# Altium PCB Payload Development Kit.PcbDoc
Units mm, origin at the board's own origin, x right, y up, seen from the top; angles counter-clockwise.
Board outline 135 x 155 mm, 6 copper layers (Top Layer, Mid-Layer 1, Mid-Layer 2, Mid-Layer 3, Mid-Layer 4, Bottom Layer), stack 3.094 mm thick; 30 components, 37 nets, 204 pads, 53 vias.
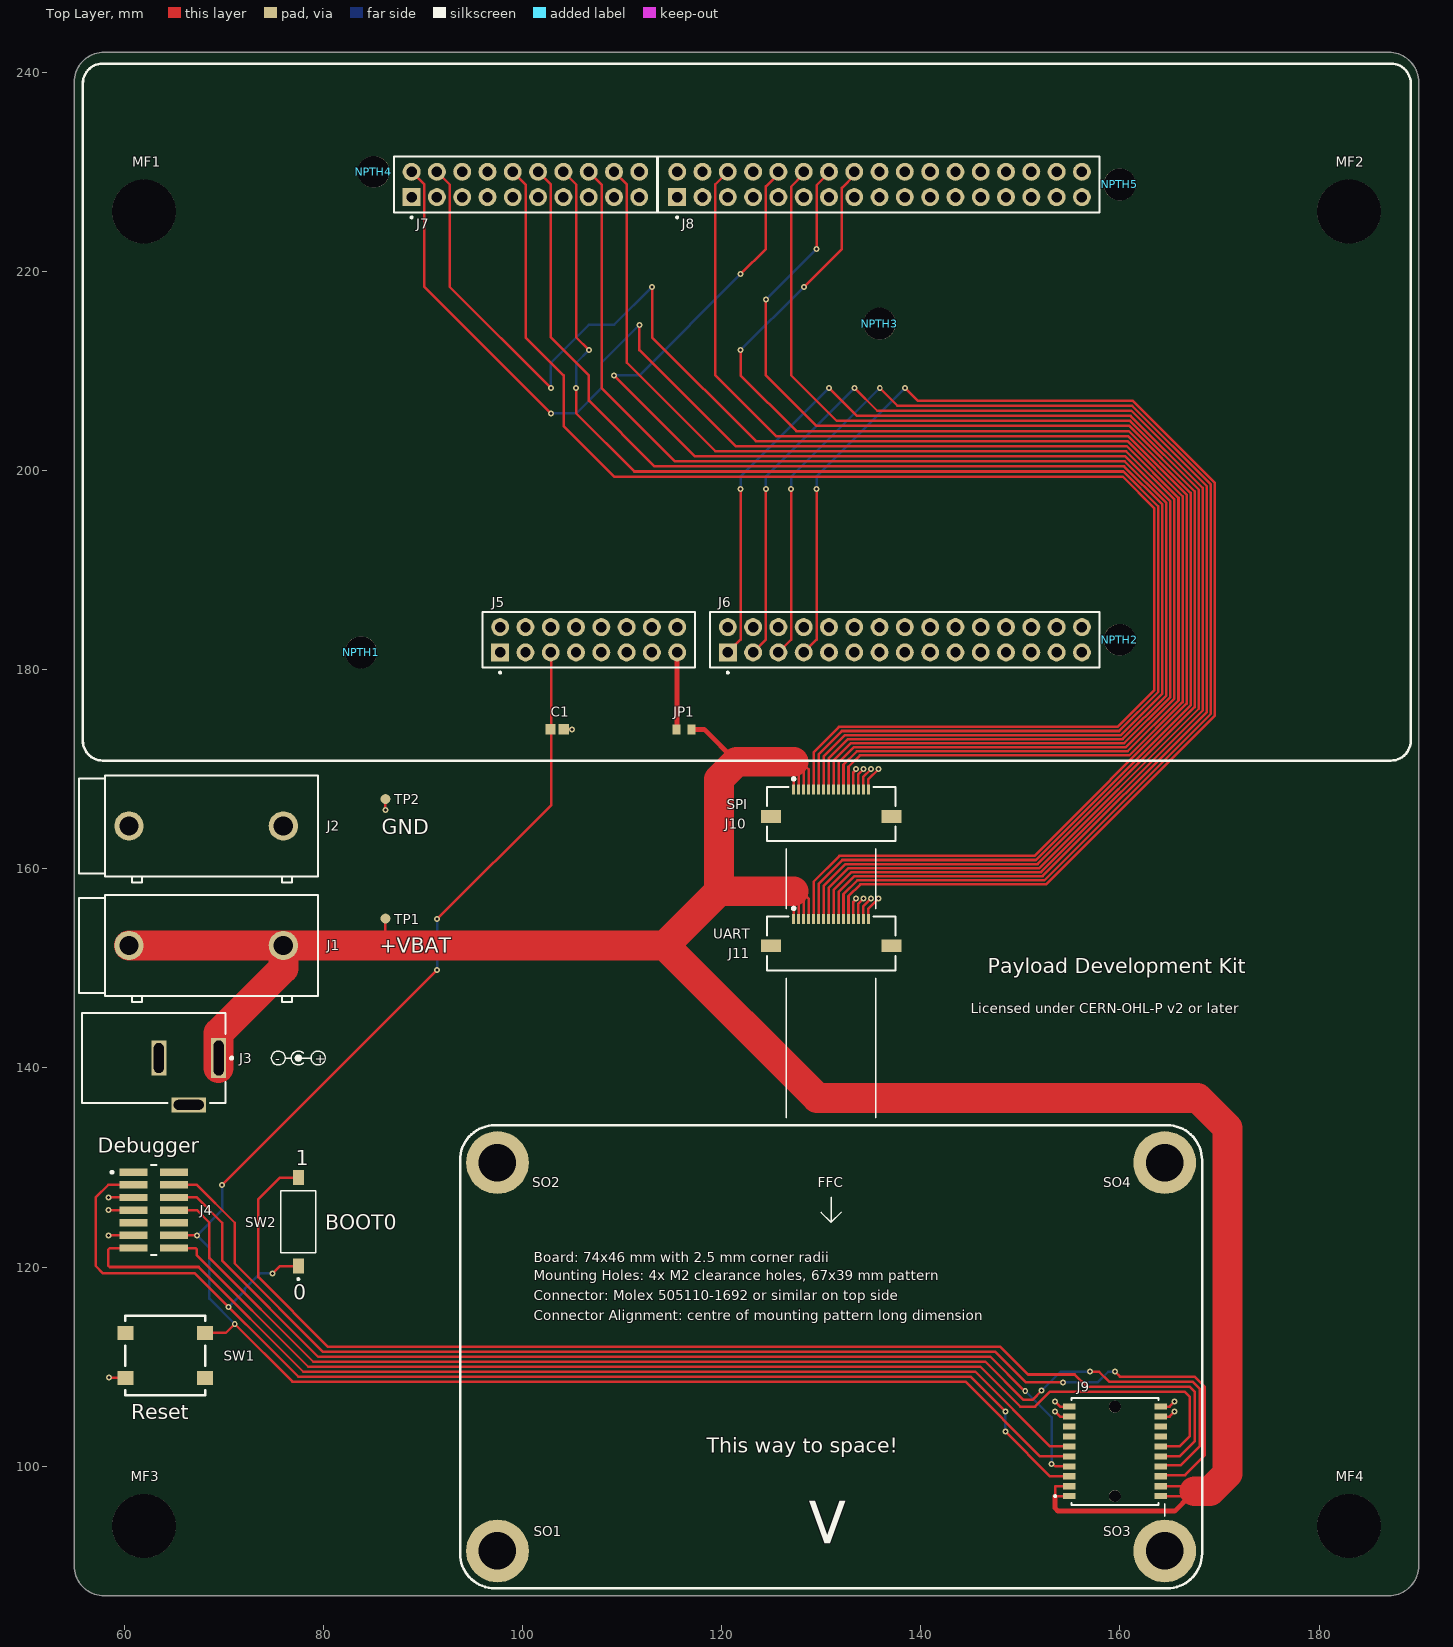
[diagram p0: Top Layer view]
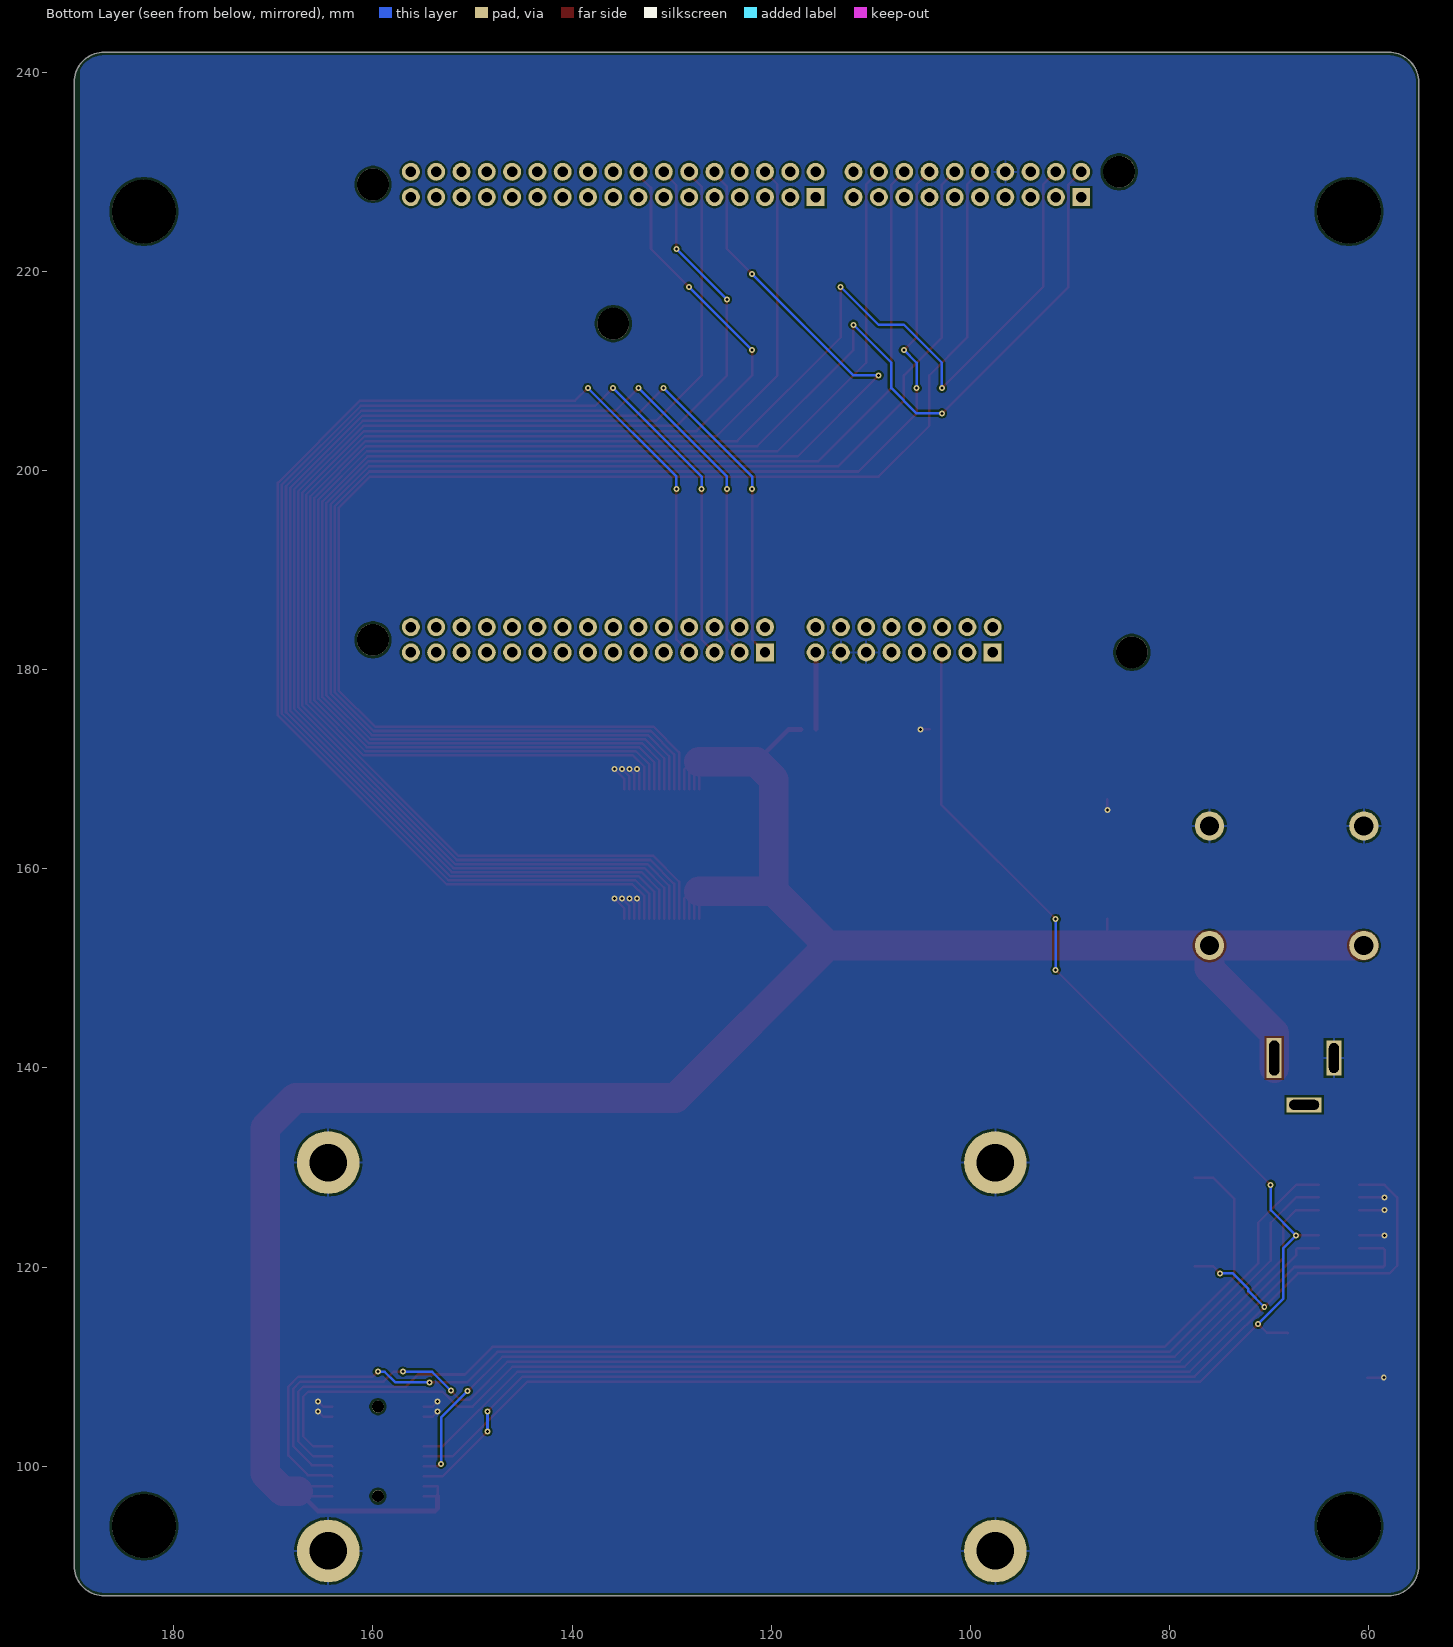
[diagram p1: Bottom Layer view, seen from below]
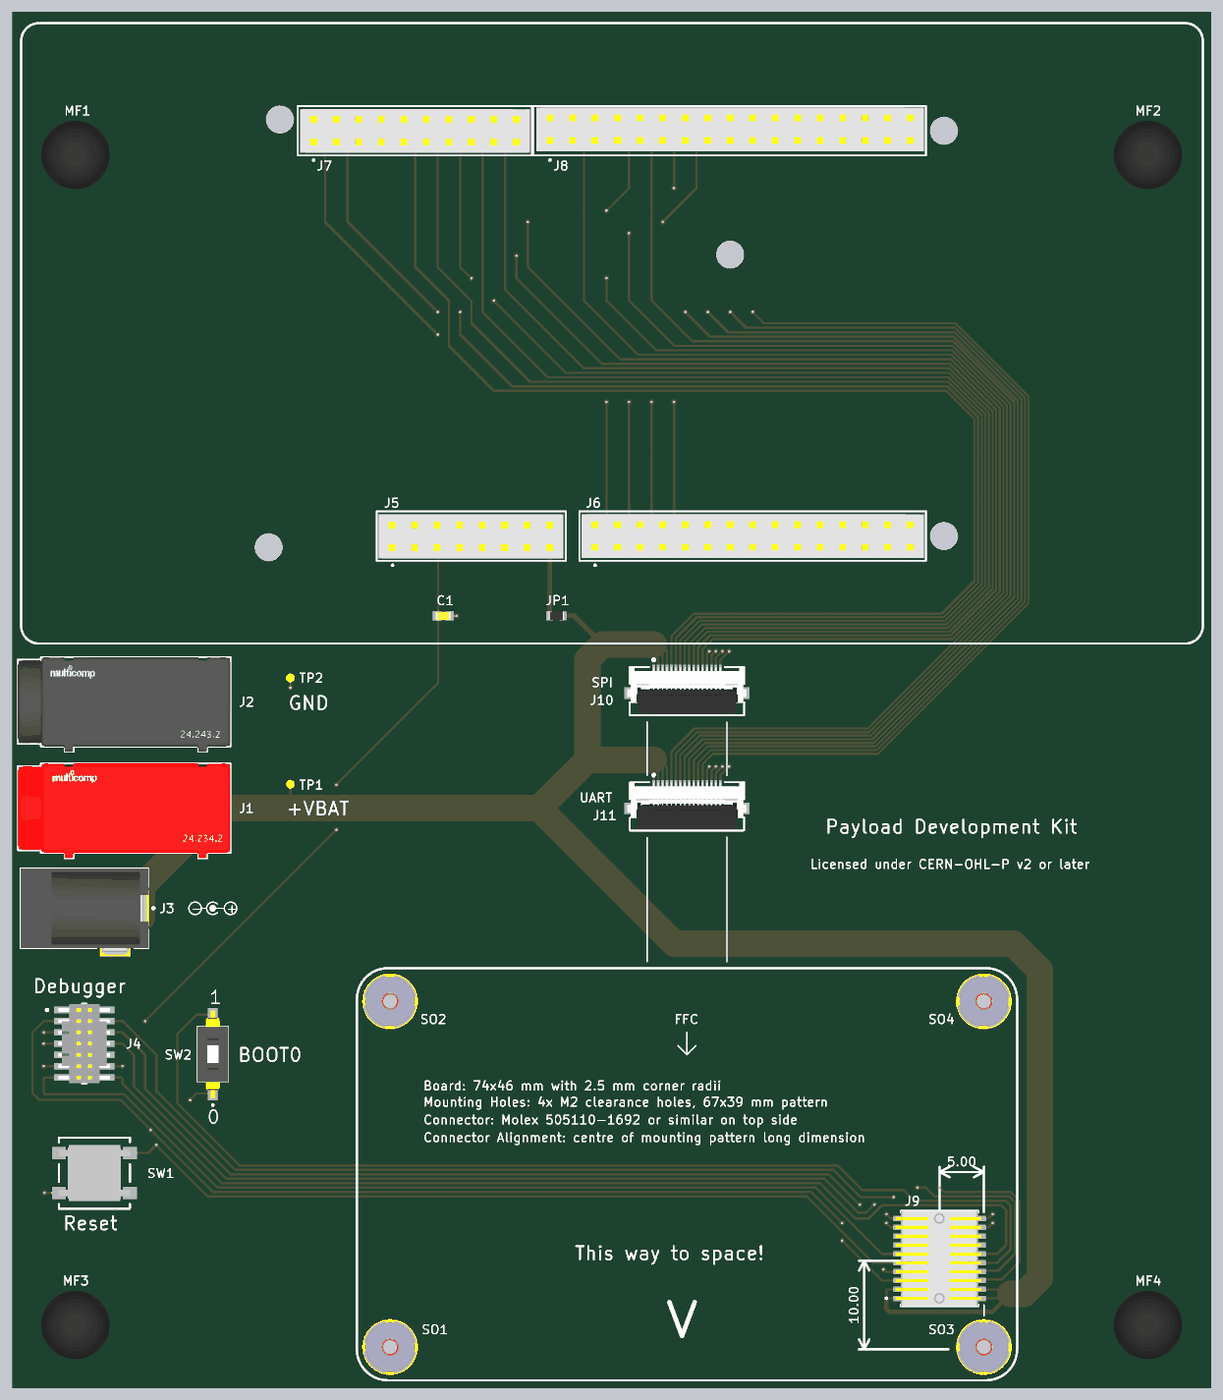
[diagram p2: 3D render of the assembled board from above, using the file's embedded part models]

## Layer stack, top to bottom
Top Solder: solder mask 0.0102, Solder Resist, Dk 3.5
Top Layer: signal copper 0.0356
Dielectric 1: dielectric 1.6, FR-4, Dk 4.8
Mid-Layer 1: signal copper 0.0356
Dielectric5: dielectric 0.32, FR-4, Dk 4.8
Mid-Layer 2: signal copper 0.0356
Dielectric3: dielectric 0.32, FR-4, Dk 4.8
Mid-Layer 3: signal copper 0.0356
Dielectric2: dielectric 0.32, FR-4, Dk 4.8
Mid-Layer 4: signal copper 0.0356
Dielectric4: dielectric 0.32, FR-4, Dk 4.8
Bottom Layer: signal copper 0.0356
Bottom Solder: solder mask 0.0102, Solder Resist, Dk 3.5

## Board outline
55,90 55,239 cw(c58,239) 58,242 187,242 cw(c187,239) 190,239 190,90 cw(c187,90) 187,87 58,87 cw(c58,90)

## Design rules (kind name [scope] priority, off if disabled: settings)
BoardOutlineClearance BoardOutlineClearanceLegend [OnLayer('Top Overlay')] p1: gap=0 ignorepadtopadclearanceinfootprint=FALSE
BoardOutlineClearance [All] p2: gap=0.3 ignorepadtopadclearanceinfootprint=FALSE
Clearance [All] p1: gap=0.2 ignorepadtopadclearanceinfootprint=TRUE except(0: Arc-Text Track-Text Via-Text Fill-Text Poly-Text Region-Text Text-Text; 0.15: SMDPad-Text THPad-Text; 0.152: Arc-Arc Arc-Track Arc-SMDPad Track-Track Track-SMDPad SMDPad-SMDPad; 0.254: Arc-Hole Track-Hole SMDPad-Hole THPad-Hole Via-Hole Fill-Hole Poly-Hole Region-Hole Text-Hole)
ComponentClearance [Not IsComponent] p1: gap=0.254 collisioncheckmode=3 verticalgap=0.254 showdistances=FALSE
HoleSize [All] p1: absolutevalues=TRUE maxlimit=6.4 minlimit=0.15 maxpercent=80.000 minpercent=20.000
MinimumAnnularRing [All] p1: minimumring=0.15
MinimumSolderMaskSliver [All] p1: minsoldermaskwidth=0.176
PolygonConnect [All] p1: thpad.connectstyle=Relief thpad.reliefconductorwidth=0.254 thpad.reliefentries=4 thpad.polygonreliefangle="90 Angle" thpad.airgapwidth=0.254 smdpad.connectstyle=Relief smdpad.reliefconductorwidth=0.254 smdpad.reliefentries=4 smdpad.polygonreliefangle="90 Angle" smdpad.airgapwidth=0.254 via.connectstyle=Direct via.reliefconductorwidth=0.254 via.reliefentries=4 via.polygonreliefangle="90 Angle" via.airgapwidth=0.254
RoutingVias [All] p1: holewidth=0.3 width=0.5 viastyle="Through Hole" minholewidth=0.3 minwidth=0.5 maxholewidth=2.8 maxwidth=3
SilkToSilkClearance [All] p1: silktosilkclearance=0.1
SolderMaskExpansion TentVias [IsVia] p1: expansion=0.102 istentingtop=TRUE
SolderMaskExpansion [All] p2: expansion=0.038 istentingtop=FALSE
Width [All] p1: maxlimit=3 minlimit=0.152 preferedwidth=0.254 midlayer1_minwidth=0.254 midlayer1_maxwidth=0.254 midlayer2_minwidth=0.254 midlayer2_maxwidth=0.254 midlayer3_minwidth=0.254 midlayer3_maxwidth=0.254 midlayer4_minwidth=0.254 midlayer4_maxwidth=0.254 minimp=50.000000 maximp=50.000000 favimp=50.000000
26 further rules are at their usual default settings.

## Components (designator, comment, footprint, x,y, rotation, side; value= is the part's Value field where it differs from the comment)
C1 "Capacitor 100 nF +/-10% 50 V 0603" CAPC1608X90X40ML10T20 103.5,174 r0 top locked value=100nF
J1 "24.243.1" FP-24_243_1-MFG 67.5,152 r0 top locked
J2 "24.243.2" FP-24_243_2-MFG 67.5,164 r0 top locked
J3 "PJ-002A" CUI-PJ-002A_V 66.5,141 r180 top locked
J4 "STDC14" FP-FTSH-107-01-L-DV-K 62.995,125.73 r270 top locked
J5 "Header 2x8" SAMTEC_SSW-108-01-T-D 106.66,183 r180 top locked
J6 "Header 2x15" SAMTEC_SSW-115-01-T-D 138.41,183 r180 top locked
J7 "Header 2x10" SAMTEC_SSW-110-01-T-D 100.31,228.72 r180 top locked
J8 "Header 2x17" SAMTEC_SSW-117-01-T-D 135.87,228.72 r180 top locked
J9 "FSI-110-03-G-D-AD" SAMTEC_FSI-110-03-X-D-AD-TR 159.5,101.5 r90 top locked
J10 "505110-1692" FP-505110-1692-MFG 131,165.5 r0 top
J11 "505110-1692" FP-505110-1692-MFG 131,152.5 r0 top locked
JP1 "CMP-009-00177-3" RESC1608X55X25ML10T15 116.25,174 r180 top value=0
MF1 "G2025" "New footprint 1" 62,226 r0 top locked
MF2 "G2025" "New footprint 1" 183,226 r0 top locked
MF3 "G2025" "New footprint 1" 62,94 r0 top locked
MF4 "G2025" "New footprint 1" 183,94 r0 top locked
NPTH1 "NPTH-M3" NPTH-M3 83.8,181.73 r180 top locked
NPTH2 "NPTH-M3" NPTH-M3 160,183 r180 top locked
NPTH3 "NPTH-M3" NPTH-M3 135.87,214.75 r180 top locked
NPTH4 "NPTH-M3" NPTH-M3 85.07,229.99 r180 top locked
NPTH5 "NPTH-M3" NPTH-M3 160,228.72 r180 top locked
SO1 "SMTSOB-M2-3ET" SMTSOB-M2-3ET 97.5,91.5 r0 top
SO2 "SMTSOB-M2-3ET" SMTSOB-M2-3ET 97.5,130.5 r0 top
SO3 "SMTSOB-M2-3ET" SMTSOB-M2-3ET 164.5,91.5 r0 top
SO4 "SMTSOB-M2-3ET" SMTSOB-M2-3ET 164.5,130.5 r0 top
SW1 "B3FS-1010P" B3FS-1010P-Footprint-1 64.135,111.125 r0 top locked
SW2 "DS04-254-2-01BK-SMT" SW_DS04-254-1-01BK-SMT 77.5,124.55 r90 top locked
TP1 "TP-1MM" TESTPOINT_1MMR-Footprint-1#1 86.25,155 r90 top
TP2 "TP-1MM" TESTPOINT_1MMR-Footprint-1#2 86.25,166.95 r90 top

## Footprints (in the part's own frame and the unit in brackets; to place one, negate y for a bottom-side part, rotate by r counter-clockwise, add the part's x,y. Pads: shape width x height; smd on the part's side, far side on the other; paste and mask are expansions set on the pad)
B3FS-1010P-Footprint-1 [mm]
  rect 1.6x1.4 smd: 1(4,-2.25) 2(-4,-2.25) 3(4,2.25) 4(-4,2.25)
  silkscreen extent -4,-4 4,4, body extent -4,-3.15 4,3.15, height 4.3
CAPC1608X90X40ML10T20 [mm] "Chip Capacitor, 2-Leads, Body 1.70x0.90mm, IPC Low Density"
  rect 1.05x1.05 smd: 1(-0.675,0) 2(0.675,0)
  body extent -0.85,-0.45 0.85,0.45, height 0.9
CUI-PJ-002A_V [mm] "THD, 3-Leads, Body 14.4x9mm, Height 11mm"
  rect 1.5x4 hole 1 slot 3.5 at 90 deg: 1(-3,0)
  rect 1.5x3.5 hole 1 slot 3 at 90 deg: 2(3,0)
  rect 3.5x1.5 hole 1 slot 3 at 0 deg: 3(0,4.7)
  silkscreen extent -4.43,-4.5 10.7,4.5, body extent -3.7,-4.5 10.7,4.9, height 11
FP-24_243_1-MFG [mm]
  round 2.95 hole 1.95 paste-1000 mask+0: 1(-7,0.3) 2(8.5,0.3)
  silkscreen extent -12,-5.35 12,5.35, body extent -12,-5.35 12,5.35, height 13.08
FP-24_243_2-MFG [mm]
  round 2.95 hole 1.95 paste-1000 mask+0: 1(-7,0.3) 2(8.5,0.3)
  silkscreen extent -12,-5.35 12,5.35, body extent -12.1,-5.45 12.1,5.45, height 0.25
FP-505110-1692-MFG [mm]
  rect 0.3x1 smd paste+0 mask+0: 1(-3.75,2.475) 2(-3.25,2.475) 3(-2.75,2.475) 4(-2.25,2.475) 5(-1.75,2.475) 6(-1.25,2.475) 7(-0.75,2.475) 8(-0.25,2.475) 9(0.25,2.475) 10(0.75,2.475) 11(1.25,2.475) 12(1.75,2.475) 13(2.25,2.475) 14(2.75,2.475) 15(3.25,2.475) 16(3.75,2.475)
  rect 2x1.3 smd paste+0 mask+0: 17(-6.05,-0.225) 18(6.05,-0.225)
  silkscreen extent -6.45,-2.73 6.45,3.65, body extent -7.15,-2.83 7.15,3.08, height 0.25
FP-FTSH-107-01-L-DV-K [mm]
  rect 0.74x2.79 smd paste+0 mask+0: 1(-3.81,-2.035) 2(-3.81,2.035) 3(-2.54,-2.035) 4(-2.54,2.035) 5(-1.27,-2.035) 6(-1.27,2.035) 7(0,-2.035) 8(0,2.035) 9(1.27,-2.035) 10(1.27,2.035) 11(2.54,-2.035) 12(2.54,2.035) 13(3.81,-2.035) 14(3.81,2.035)
  silkscreen extent -4.51,-4.32 4.51,0.27, body extent -4.61,-3.53 4.61,3.53, height 0.25
"New footprint 1" [mm]
  round 6.4 hole 6.4 unplated: Hole(0,0)
  body extent -6.35,-6.35 6.34,6.35, height 3.31
NPTH-M3 [mm]
  round 3.2 hole 3.2 unplated: 1(0,0)
RESC1608X55X25ML10T15 [mm] "Chip Resistor, 2-Leads, Body 1.70x0.90mm, IPC Low Density"
  rect 0.8x1 smd: 1(-0.75,0) 2(0.75,0)
  body extent -0.85,-0.45 0.85,0.45, height 0.55
SAMTEC_FSI-110-03-X-D-AD-TR [mm]
  rect 0.61x1.26 smd: 1(-4.5,4.59) 2(-4.5,-4.59) 3(-3.5,4.59) 4(-3.5,-4.59) 5(-2.5,4.59) 6(-2.5,-4.59) 7(-1.5,4.59) 8(-1.5,-4.59) 9(-0.5,4.59) 10(-0.5,-4.59) 11(0.5,4.59) 12(0.5,-4.59) 13(1.5,4.59) 14(1.5,-4.59) 15(2.5,4.59) 16(2.5,-4.59) 17(3.5,4.59) 18(3.5,-4.59) 19(4.5,4.59) 20(4.5,-4.59)
  round 1.19 hole 1.19 unplated: ""(-4.5,0) ""(4.5,0)
  silkscreen extent -5.38,-4.38 5.38,6.1, body extent -5.38,-4.98 5.38,5.02, height 4.25
SAMTEC_SSW-108-01-T-D [mm]
  rect 1.8x1.8 hole 1.04: 1(8.89,1.27)
  round 1.8 hole 1.04: 2(8.89,-1.27) 3(6.35,1.27) 4(6.35,-1.27) 5(3.81,1.27) 6(3.81,-1.27) 7(1.27,1.27) 8(1.27,-1.27) 9(-1.27,1.27) 10(-1.27,-1.27) 11(-3.81,1.27) 12(-3.81,-1.27) 13(-6.35,1.27) 14(-6.35,-1.27) 15(-8.89,1.27) 16(-8.89,-1.27)
  silkscreen extent -10.67,-2.79 10.67,3.4, body extent -10.37,-2.43 10.45,2.53, height 8.51
SAMTEC_SSW-110-01-T-D [mm]
  rect 1.8x1.8 hole 1.04: 1(11.43,1.27)
  round 1.8 hole 1.04: 2(11.43,-1.27) 3(8.89,1.27) 4(8.89,-1.27) 5(6.35,1.27) 6(6.35,-1.27) 7(3.81,1.27) 8(3.81,-1.27) 9(1.27,1.27) 10(1.27,-1.27) 11(-1.27,1.27) 12(-1.27,-1.27) 13(-3.81,1.27) 14(-3.81,-1.27) 15(-6.35,1.27) 16(-6.35,-1.27) 17(-8.89,1.27) 18(-8.89,-1.27) 19(-11.43,1.27) 20(-11.43,-1.27)
  silkscreen extent -13.21,-2.79 13.21,3.4, body extent -12.95,-2.48 12.95,2.48, height 8.51
SAMTEC_SSW-115-01-T-D [mm]
  rect 1.8x1.8 hole 1.04: 1(17.78,1.27)
  round 1.8 hole 1.04: 2(17.78,-1.27) 3(15.24,1.27) 4(15.24,-1.27) 5(12.7,1.27) 6(12.7,-1.27) 7(10.16,1.27) 8(10.16,-1.27) 9(7.62,1.27) 10(7.62,-1.27) 11(5.08,1.27) 12(5.08,-1.27) 13(2.54,1.27) 14(2.54,-1.27) 15(0,1.27) 16(0,-1.27) 17(-2.54,1.27) 18(-2.54,-1.27) 19(-5.08,1.27) 20(-5.08,-1.27) 21(-7.62,1.27) 22(-7.62,-1.27) 23(-10.16,1.27) 24(-10.16,-1.27) 25(-12.7,1.27) 26(-12.7,-1.27) 27(-15.24,1.27) 28(-15.24,-1.27) 29(-17.78,1.27) 30(-17.78,-1.27)
  silkscreen extent -19.56,-2.79 19.56,3.4, body extent -19.3,-2.48 19.3,2.48, height 8.51
SAMTEC_SSW-117-01-T-D [mm]
  rect 1.8x1.8 hole 1.04: 1(20.32,1.27)
  round 1.8 hole 1.04: 2(20.32,-1.27) 3(17.78,1.27) 4(17.78,-1.27) 5(15.24,1.27) 6(15.24,-1.27) 7(12.7,1.27) 8(12.7,-1.27) 9(10.16,1.27) 10(10.16,-1.27) 11(7.62,1.27) 12(7.62,-1.27) 13(5.08,1.27) 14(5.08,-1.27) 15(2.54,1.27) 16(2.54,-1.27) 17(0,1.27) 18(0,-1.27) 19(-2.54,1.27) 20(-2.54,-1.27) 21(-5.08,1.27) 22(-5.08,-1.27) 23(-7.62,1.27) 24(-7.62,-1.27) 25(-10.16,1.27) 26(-10.16,-1.27) 27(-12.7,1.27) 28(-12.7,-1.27) 29(-15.24,1.27) 30(-15.24,-1.27) 31(-17.78,1.27) 32(-17.78,-1.27) 33(-20.32,1.27) 34(-20.32,-1.27)
  silkscreen extent -22.1,-2.79 22.24,3.4, body extent -21.84,-2.64 21.84,2.31, height 8.51
SMTSOB-M2-3ET [mm] "M2x3mm SMD Standoff, Brass"
  round 6.3 hole 3.77: 1(0,0)
  body extent -2.78,-2.77 2.78,2.77, height 3
SW_DS04-254-1-01BK-SMT [mm]
  rect 1.5x1.1 smd: 1(-4.45,0) 2(4.45,0)
  silkscreen extent -5.85,-1.77 3.1,1.77, body extent -4.95,-1.77 4.95,1.77, height 4.42
TESTPOINT_1MMR-Footprint-1#1 [mm]
  round 1 smd paste-1: 1(0,0)
TESTPOINT_1MMR-Footprint-1#2 [mm]
  round 1 smd paste-1: 1(0.05,0)

## Part data
C1: library part CMP-001-00130-3, "Chip Capacitor, 100 nF, +/- 10%, 50 V, 0603 (1608 Metric)", Capacitor Type=Ceramic, Case/Package=0603, Max Operating Temperature=125°C, Min Operating Temperature=-55°C, Tolerance=10%, Voltage Rating=50V, Component Type=Standard, Design Item ID=CMP-001-00017-10, Mounting Technology="Surface Mount", Pins=2, RoHS Compliant=Yes, Source="Components - 14.07.23 - 14.28.SchLib"
J1: library part CMP-002-00135-3, "Banana Test Connector, 4mm, Socket, PCB Mount, 24 A, 60 VDC, Silver Plated Contacts, Red", Component Type=Connectors, Design Item ID=CMP-002-00024-4, Pins=2, RoHS Compliant=Yes, Source="Spacecraft Emulator Nucleo-144 Shield.SCHLIB"
J2: library part CMP-002-00134-3, "Banana Test Connector, 4mm, Socket, PCB Mount, 24 A, 60 VDC, Silver Plated Contacts, Black", Component Type=Connectors, Design Item ID=CMP-002-00023-3, Pins=2, RoHS Compliant=Yes, Source="Spacecraft Emulator Nucleo-144 Shield.SCHLIB"
J3: library part CMP-002-00139-1, "2.1mm Dia Centre Pin, 5.5mm barrel, 24V, 2.5A", Max Current Rating=2.5A, Voltage Rating=24V, Connector Type=Circular,Power, Mounting Technology=Board, RoHS Compliant=Yes
J4: library part CMP-049-000000-6, "STDC14 for STLINK Programmer", ComponentLink1Description="Manufacturer Link", ComponentLink1URL=https://www.st.com/en/development-tools/stlink-v3mini.html#overview, Design Item ID=CMP-002-00076-5, Mounting Technology=Board, RoHS Compliant=Yes, Source=STDC14.SchLib
J5: library part CMP-002-00130-14, Max Operating Temperature=125°C, Min Operating Temperature=-65°C, Component Type=Connectors, Connector Type="BOARD CONNECTOR", Design Item ID=CMP-002-00019-12, Mounting Technology=Board, Pins=16, RoHS Compliant=Yes, Source="Spacecraft Emulator Nucleo-144 Shield.SCHLIB"
J6: library part CMP-002-00131-10, Max Operating Temperature=125°C, Min Operating Temperature=-65°C, Component Type=Connectors, Design Item ID=CMP-002-00020-6, Mounting Technology=Board, Pins=30, RoHS Compliant=Yes, Source="Spacecraft Emulator Nucleo-144 Shield.SCHLIB"
J7: library part CMP-002-00132-12, Max Operating Temperature=125°C, Min Operating Temperature=-65°C, Component Type=Connectors, Connector Type="BOARD CONNECTOR", Design Item ID=CMP-002-00021-9, Mounting Technology=Board, Pins=20, RoHS Compliant=Yes, Source="Spacecraft Emulator Nucleo-144 Shield.SCHLIB"
J8: library part CMP-002-00133-10, Max Operating Temperature=125°C, Min Operating Temperature=-65°C, Component Type=Connectors, Design Item ID=CMP-002-00022-6, Mounting Technology=Board, Pins=34, RoHS Compliant=Yes, Source="Spacecraft Emulator Nucleo-144 Shield.SCHLIB"
J9: library part CMP-002-00138-2, "20 Position, 2 Row, 1mm Pich One Piece Connector, SMD, Samtec FSI-110-03-G-D-AD", ComponentLink1Description="Manufacturer Page", ComponentLink1URL=https://www.samtec.com/products/fsi-110-03-g-d-ad, Design Item ID=CMP-002-00071-3, Source=FSI-110-03-G-D-AD.SchLib
J10 J11: library part CMP-002-00136-2, "Conn FFC/FPC Connector SKT 16 POS 0.5mm Solder RA SMD Easy-On™ T/R", Component Type=Connectors, Design Item ID=CMP-002-00072-15, Pins=18, Source="Spacecraft Emulator Nucleo-144 Shield.SCHLIB"
JP1: library part CMP-082-000000-1, "Jumper 0603", Case/Package=0603, Max Operating Temperature=155°C, Min Operating Temperature=-55°C, Component Type=Standard, Design Item ID=CMP-009-00177-3, Pin Count=2, Pins=2, Source="Components - 20.07.23 - 16.55.SchLib"
MF1 MF2 MF3 MF4: library part CMP-00028-00024-4, "Rubber Push-In Bumper Ø12.7 mm by 12.7 mm high"
NPTH1 NPTH2 NPTH3 NPTH4 NPTH5: library part CMP-00000-2, "M3 Non-Plated Through Hole", Component Type=Mechanical, Design Item ID=CMP-00028-00015-4, Pin Count=1, Pins=1, Source="Spacecraft Emulator Nucleo-144 Shield.SCHLIB"
SO1 SO2 SO3 SO4: library part CMP-00028-00023-1, "M2x3mm SMD Standoff, Brass", Design Item ID=CMP-00028-00008-1, Pins=1, Source="Components - 17.07.23 - 17.23.SchLib"
SW1: library part CMP-011-00019-2, "Keypad Switch, 1 Switches, SPST, Momentary-tactile, 0.05A, 24VDC, 1.27N, Solder Terminal, Surface Mount-straight", Max Current Rating=50mA, Max Operating Temperature=70°C, Min Operating Temperature=-25°C, Voltage Rating=24V, Mounting Technology="Surface Mount", RoHS Compliant=Yes
SW2: library part CMP-011-00020-4, "DIP Switch"
TP1 TP2: library part CMP-00001-2, "1mm Round Test Point", Component Type=Miscellaneous, Design Item ID=CMP-001-0000-4, Pin Count=1, Source="Spacecraft Emulator Nucleo-144 Shield.SCHLIB"

## Via types
v1: diameter 0.6, hole 0.3, Top Layer to Bottom Layer, tented both sides, 53 vias

## Nets (pads, with @x,y where several pads share a name; then routed paths per layer and width w, separated by ;. In a path a pad name is that pad's centre, name@x,y a point inside that pad or via, vN(x,y) a via of type N, cw(c..) or ccw(c..) an arc to the next point about the centre after c; other vN are vias at no path point)
+VBAT: J1.1 J1.2 J3.1 J9.1 J9.2 J9.3 J9.4 J10.1 J10.2 J10.3 J10.4 J11.1 J11.2 J11.3 J11.4 JP1.1 TP1.1 | length 269.3
  Top Layer w0.254: 86,152.3 86.25,152.55 TP1.1 ; J11.1 127.25,156.25 126.5,157 126.5,157.5 126.75,157.75 ; J10.1 127.25,169.25 126.5,170 126.5,170.5 126.75,170.75 ; J11.2 127.75,156.5 126.75,157.5 126.75,157.75 ; J10.2 127.75,169.5 126.75,170.5 126.75,170.75 ; J11.3 128.25,156.75 127.25,157.75 ; J10.3 128.25,169.75 127.25,170.75 ; J11.4 128.75,157 128,157.75 127.25,157.75 ; J10.4 128.75,170 128,170.75 127.25,170.75 ; J9.1 153.5,97 153.5,98 J9.3 ; J9.2 167,97 167.5,97.5 167,98 J9.4 ; 126.75,157.75 127.25,157.75 ; 126.75,170.75 127.25,170.75
  Top Layer w0.5: JP1.1 118.257,174 121.507,170.75 ; 153.5,97 153.5,95.793 153.793,95.5 165.5,95.5 167,97
  Top Layer w3: J1.1 J1.2 ; J3.1@69.5,140 J3.1 69.5,143.5 76,150 J1.2 ; 127.25,157.75 119.75,157.75 ; 127.25,170.75 121.507,170.75 119.75,168.993 119.75,157.75 ; 167.5,97.5 169.058,97.5 170.815,99.257 170.815,133.985 167.8,137 129.6,137 114.3,152.3 ; J1.2 86,152.3 114.3,152.3 ; 114.3,152.3 119.75,157.75
ADC1_INP5: J6.7 J11.12 | length 135.8
  Top Layer w0.254: J6.7 129.54,183.02 v1(129.54,198.12) ; J11.12 132.75,157.25 133.945,158.445 152.588,158.445 169.545,175.402 169.545,198.755 161.29,207.01 139.7,207.01 v1(138.43,208.28)
  Bottom Layer w0.254: v1(129.54,198.12) 129.54,199.39 v1(138.43,208.28)
ADC1_INP10: J6.3 J11.10 | length 140.1
  Top Layer w0.254: J6.3 124.46,183.02 v1(124.46,198.12) ; J11.10 131.75,157.664 133.344,159.258 152.252,159.258 168.732,175.739 168.732,198.418 161.157,205.994 135.636,205.994 v1(133.35,208.28)
  Bottom Layer w0.254: v1(124.46,198.12) 124.46,199.39 v1(133.35,208.28)
ADC1_INP15: J6.1 J11.9 | length 142.2
  Top Layer w0.254: J6.1 121.92,183.02 v1(121.92,198.12) ; v1(130.81,208.28) 133.604,205.486 161.09,205.486 168.326,198.25 168.326,175.907 152.083,159.664 133.043,159.664 131.25,157.871 J11.9
  Bottom Layer w0.254: v1(121.92,198.12) 121.92,199.39 v1(130.81,208.28)
ADC3_INP0: J6.9
ADC3_INP1: J6.5 J11.11 | length 137.9
  Top Layer w0.254: J6.5 127,183.02 v1(127,198.12) ; J11.11 132.25,157.457 133.644,158.852 152.42,158.852 169.139,175.57 169.139,198.587 161.223,206.502 137.668,206.502 v1(135.89,208.28)
  Bottom Layer w0.254: v1(127,198.12) 127,199.39 v1(135.89,208.28)
ADC3_INP6: J6.11
BOOT0: J9.10 SW2.2 | length 120.5
  Top Layer w0.254: SW2.2 75.66,129 73.5,126.84 73.5,119 80.5,112 148,112 150.78,109.22 155.464,109.22 156.684,108 167,108 167.5,107.5 167.5,102.5 166,101 J9.10
DEBUG_GPIO1: J9.13
DEBUG_GPIO2: J9.14
DEBUG_GPIO3: J9.15
DEBUG_GPIO4: J9.16
DEBUG_UART_RX: J4.13 J9.11 | length 108.2
  Top Layer w0.254: J4.13 58.569,121.92 58.42,121.771 58.42,120.164 58.569,120.015 67.485,120.015 78,109.5 145.5,109.5 153,102 J9.11
DEBUG_UART_TX: J4.14 J9.12 | length 117.1
  Top Layer w0.254: J4.14 67.161,121.92 67.31,121.771 67.31,121.19 78.5,110 146,110 150,106 151.5,106 153,107.5 166.5,107.5 167,107 167,103 166,102 J9.12
EXTI13: J8.10 J10.9 | length 148.9
  Top Layer w0.254: v1(109.22,209.55) 117.348,201.422 160.556,201.422 165.075,196.903 165.075,177.254 160.439,172.618 132.997,172.618 131.25,170.871 J10.9 ; v1(121.92,219.71) 124.46,222.25 124.46,228.535 125.71,229.785 J8.10
  Bottom Layer w0.254: v1(109.22,209.55) 111.76,209.55 v1(121.92,219.71)
EXTI14: J8.12 J11.8 | length 136.4
  Top Layer w0.254: J8.12 128.25,229.75 127,228.5 127,209.55 131.572,204.978 161.023,204.978 167.919,198.082 167.919,176.075 151.915,160.071 132.742,160.071 130.75,158.078 J11.8
GND: C1.2 J2.1 J2.2 J3.2 J4.5 J4.7 J4.11 J5.11 J5.13 J7.8 J9.17 J9.18 J9.19 J9.20 J10.13 J10.14 J10.15 J10.16 J11.13 J11.14 J11.15 J11.16 SO1.1 SO2.1 SO3.1 SO4.1 SW1.2 TP2.1 | length 36
  Top Layer w0.254: v1(58.42,123.19) J4.11 ; v1(58.42,125.73) J4.7 ; v1(58.42,127) J4.5 ; v1(58.5,108.9) 60.11,108.9 SW1.2 ; v1(86.25,165.9) TP2.1 ; C1.2@104.075,174 v1(105,174) ; J11.13 133.25,156.683 133.5,156.933 v1(133.5,157) ; J10.13 133.25,169.683 133.5,169.933 v1(133.5,170) ; J11.14 133.75,156.5 v1(134.25,157) ; J10.14 133.75,169.5 v1(134.25,170) ; J11.15 134.25,156.25 v1(135,157) ; J10.15 134.25,169.25 v1(135,170) ; J11.16 134.75,156 v1(135.75,157) ; J10.16 134.75,169 v1(135.75,170) ; v1(153.5,105.5) 154,105 J9.17 ; v1(153.5,106.5) 154,106 J9.19 ; J9.18 165,105 v1(165.5,105.5) ; J9.20 165,106 v1(165.5,106.5)
I2C1_SCL: J7.2 J10.11 | length 166
  Top Layer w0.254: J7.2 90.17,228.7 90.17,218.44 v1(102.87,205.74) ; v1(111.76,214.63) 111.76,212.09 121.412,202.438 160.689,202.438 165.887,197.24 165.887,176.917 160.776,171.806 133.598,171.806 132.25,170.457 J10.11
  Bottom Layer w0.254: v1(102.87,205.74) 105.41,205.74 107.95,208.28 107.95,210.82 v1(111.76,214.63)
I2C1_SDA: J7.4 J10.12 | length 166.4
  Top Layer w0.254: J7.4 92.71,228.7 92.71,218.44 v1(102.87,208.28) ; v1(113.03,218.44) 113.03,213.36 123.444,202.946 160.756,202.946 166.294,197.408 166.294,176.749 160.944,171.399 133.899,171.399 132.75,170.25 J10.12
  Bottom Layer w0.254: v1(102.87,208.28) 102.87,210.82 106.68,214.63 109.22,214.63 v1(113.03,218.44)
MCU_VDD: J4.3 J9.5 SW2.1 | length 127.7
  Top Layer w0.254: J4.3 58.42,128.27 57.15,127 57.15,120.142 57.912,119.38 67.12,119.38 77.5,109 145,109 v1(148.5,105.5) ; v1(74.93,119.38) 75.65,120.1 SW2.1 ; v1(148.5,103.5) 153,99 J9.5
  Bottom Layer w0.254: v1(70.5,116) 72.104,117.604 72.104,117.824 73.66,119.38 v1(74.93,119.38) ; v1(148.5,103.5) v1(148.5,105.5)
NetJ5_15: J5.15 JP1.2 | length 7.8
  Top Layer w0.254: JP1.2 JP1.2@115.525,174.025 ; J5.15@115.525,181.705 J5.15
  Top Layer w0.5: JP1.2@115.525,174.025 J5.15@115.525,181.705
NRST: C1.1 J4.12 J5.5 J9.9 SW1.3 | length 178.7
  Top Layer w0.254: J4.12 v1(67.31,123.19) ; SW1.3 68.171,113.411 70.231,113.411 v1(71.12,114.3) 76.92,108.5 144.5,108.5 152,101 J9.9 ; v1(69.85,128.27) v1(91.44,149.86) ; v1(91.44,154.94) 102.925,166.425 102.925,174 102.925,181.655 J5.5
  Bottom Layer w0.254: v1(69.85,128.27) 69.85,125.73 v1(67.31,123.19) 68.58,121.92 68.58,116.84 v1(71.12,114.3) ; v1(91.44,149.86) v1(91.44,154.94)
PD15: J7.18 J10.10 | length 139.5
  Top Layer w0.254: J7.18 110.49,228.7 110.49,210.82 119.38,201.93 160.623,201.93 165.481,197.072 165.481,177.085 160.608,172.212 133.298,172.212 131.75,170.664 J10.10
PE9: J8.4
PE11: J8.6 J11.5 | length 142.8
  Top Layer w0.254: J8.6 119.38,228.74 119.38,209.55 125.476,203.454 160.823,203.454 166.7,197.577 166.7,176.58 151.41,161.29 131.84,161.29 129.25,158.7 J11.5
PE14: J8.8
PF3: J7.20
PG12: J8.2
SPI1_CS: J7.16 J10.8 | length 142.7
  Top Layer w0.254: J7.16 107.95,228.7 107.95,208.28 115.316,200.914 160.489,200.914 164.668,196.735 164.668,177.422 160.271,173.025 132.696,173.025 130.75,171.078 J10.8
SPI1_PICO: J7.14 J10.6 | length 147
  Top Layer w0.254: J7.14 105.41,228.7 105.41,213.36 v1(106.68,212.09) ; v1(105.41,208.28) 105.41,205.74 111.252,199.898 160.356,199.898 163.855,196.398 163.855,177.759 159.934,173.838 132.095,173.838 129.75,171.493 J10.6
  Bottom Layer w0.254: v1(105.41,208.28) 105.41,210.82 v1(106.68,212.09)
SPI1_POCI: J7.12 J10.7 | length 145.9
  Top Layer w0.254: J7.12 102.87,228.7 102.87,213.36 106.68,209.55 106.68,207.01 113.284,200.406 160.422,200.406 164.262,196.567 164.262,177.59 160.103,173.431 132.396,173.431 130.25,171.286 J10.7
SPI1_SCK: J7.10 J10.5 | length 149.2
  Top Layer w0.254: J7.10 100.33,228.7 100.33,213.36 104.14,209.55 104.14,204.47 109.22,199.39 160.289,199.39 163.449,196.23 163.449,177.927 159.766,174.244 131.794,174.244 129.25,171.7 J10.5
SWCLK: J4.6 J9.7 | length 106
  Top Layer w0.254: J4.6 67.31,127 69.85,124.46 69.85,120.65 79.5,111 147,111 150.44,107.56 v1(150.5,107.56) ; v1(153.158,100.257) 153.252,100.257 153.509,100 J9.7
  Bottom Layer w0.254: v1(150.5,107.56) 153.158,104.902 v1(153.158,100.257)
SWDIO: J4.4 J9.6 | length 127.3
  Top Layer w0.254: J4.4 67.31,128.27 71.12,124.46 71.12,120.38 80,111.5 147.5,111.5 150.577,108.423 v1(154.307,108.423) ; v1(159.5,109.5) 160,109 167.5,109 168.5,108 168.5,101.086 166.541,99.127 164.217,99.127 J9.6
  Bottom Layer w0.254: v1(154.307,108.423) 157.755,108.423 158.832,109.5 v1(159.5,109.5)
SWO: J4.8 J9.8 | length 125.3
  Top Layer w0.254: J4.8 67.31,125.73 68.58,124.46 68.58,120.92 79,110.5 146.5,110.5 150.32,106.68 151.237,106.68 v1(152.149,107.591) ; v1(157,109.5) 157.925,109.5 158.925,108.5 167.304,108.5 168,107.804 168,102 166.127,100.127 164.217,100.127 J9.8
  Bottom Layer w0.254: v1(152.149,107.591) 154.057,109.5 v1(157,109.5)
UART1_RX: J8.16 J11.6 | length 144.9
  Top Layer w0.254: v1(121.92,212.09) 121.92,209.55 127.508,203.962 160.89,203.962 167.107,197.745 167.107,176.412 151.578,160.884 132.141,160.884 129.75,158.493 J11.6 ; v1(128.27,218.44) 132.08,222.25 132.08,228.386 133.33,229.636 J8.16
  Bottom Layer w0.254: v1(121.92,212.09) v1(128.27,218.44)
UART1_TX: J8.14 J11.7 | length 140.6
  Top Layer w0.254: v1(124.46,217.17) 124.46,209.55 129.54,204.47 160.956,204.47 167.513,197.913 167.513,176.244 151.747,160.477 132.442,160.477 130.25,158.286 J11.7 ; v1(129.54,222.25) 129.54,228.64 130.79,229.89 J8.14
  Bottom Layer w0.254: v1(124.46,217.17) v1(129.54,222.25)
pads on no net: J3.3 J4.1 J4.2 J4.9 J4.10 J5.1 J5.2 J5.3 J5.4 J5.6 J5.7 J5.8 J5.9 J5.10 J5.12 J5.14 J5.16 J6.2 J6.4 J6.6 J6.8 J6.10 J6.12 J6.13 J6.14 J6.15 J6.16 J6.17 J6.18 J6.19 J6.20 J6.21 J6.22 J6.23 J6.24 J6.25 J6.26 J6.27 J6.28 J6.29 J6.30 J7.1 J7.3 J7.5 J7.6 J7.7 J7.9 J7.11 J7.13 J7.15 J7.17 J7.19 J8.1 J8.3 J8.5 J8.7 J8.9 J8.11 J8.13 J8.15 J8.17 J8.18 J8.19 J8.20 J8.21 J8.22 J8.23 J8.24 J8.25 J8.26 J8.27 J8.28 J8.29 J8.30 J8.31 J8.32 J8.33 J8.34 J9. J10.17 J10.18 J11.17 J11.18 MF1.Hole MF2.Hole MF3.Hole MF4.Hole NPTH1.1 NPTH2.1 NPTH3.1 NPTH4.1 NPTH5.1 SW1.1 SW1.4

## Polygon pours and split planes (outlines as drawn)
GND on Bottom Layer "GND_L06_P001" (solid, pour order 1): 54.401,242.307 189.401,242.307 189.401,87.307 54.401,87.307

## Silkscreen, mask and mechanical layers (free items; w line width, h text height)
Top Overlay:
  circle w0.152: c77.5,141 r0.3
  circle w0.152: c75.5,141 r0.7
  circle w0.152: c79.5,141 r0.7
  circle w0.152: c77.5,141 r0
  circle w0.152: c77.5,141 r0.2
  circle w0.152: c77.5,141 r0.1
  lines w0.152: 76.2,141 76.8,141 ; 77.7,141 78.8,141 ; 77.995,140.505 cw(c77.5,141) 77.995,141.495 ; 126.5,135 126.5,149 ; 126.5,156 126.5,162 ; 130,125.5 131,124.5 ; 131,127 131,124.5 ; 132,125.5 131,124.5 ; 135.5,135 135.5,149 ; 135.5,156 135.5,162 ; 164.5,95 164.5,96.25
  lines w0.254: 55.869,172.864 ccw(c57.869,172.864) 57.869,170.864 187.209,170.864 ccw(c187.209,172.864) 189.209,172.864 189.209,238.864 ccw(c187.209,238.864) 187.209,240.864 57.869,240.864 ccw(c57.869,238.864) 55.869,238.864 55.869,172.864 ; 93.75,91.25 ccw(c97.25,91.25) 97.25,87.75 164.75,87.75 ccw(c164.75,91.25) 168.25,91.25 168.25,130.75 ccw(c164.75,130.75) 164.75,134.25 97.25,134.25 ccw(c97.25,130.75) 93.75,130.75 93.75,91.25
  text "SPI" at 120.514,166 h1
  text "GND" at 85.9,163.45 h1.5
  text "UART" at 119.182,153 h1
  text "+VBAT" at 85.7,151.55 h1.5
  text "Payload Development Kit" at 146.755,149.5 h1.5
  text "Licensed under CERN-OHL-P v2 or later" at 145.006,145.5 h1
  text "-" at 75.167,140.5 h1
  text "+" at 79.167,140.5 h1
  text "Debugger" at 57.377,131.5 h1.5
  text "1" at 77.25,130.25 h1.5
  text "FFC" at 129.667,128 h1
  text "BOOT0" at 80.2,123.75 h1.5
  text "Board: 74x46 mm with 2.5 mm corner radii" at 101.153,120.5 h1
  text "Mounting Holes: 4x M2 clearance holes, 67x39 mm pattern" at 101.153,118.667 h1
  text "0" at 77,116.75 h1.5
  text "Connector: Molex 505110-1692 or similar on top side" at 101.153,116.667 h1
  text "Connector Alignment: centre of mounting pattern long dimension" at 101.153,114.667 h1
  text "Reset" at 60.751,104.75 h1.5
  text "This way to space!" at 118.504,101.375 h1.5
  text ">" at 128.501,97.25 h5 r270
Board Shape:
  the board outline again, w0.254

## Dimensions
164.5,106.75 to 159.5,110.5 on Top Overlay
160.5,91.25 to 153.5,101.25 on Top Overlay